# Altium PCB Optosense.PcbDoc
Units mm, origin at the board's own origin, x right, y up, seen from the top; angles counter-clockwise.
Board outline 54.67 x 13 mm, 2 copper layers (Top Layer, Bottom Layer), stack 0.571 mm thick; 46 components, 28 nets, 114 pads, 20 vias.
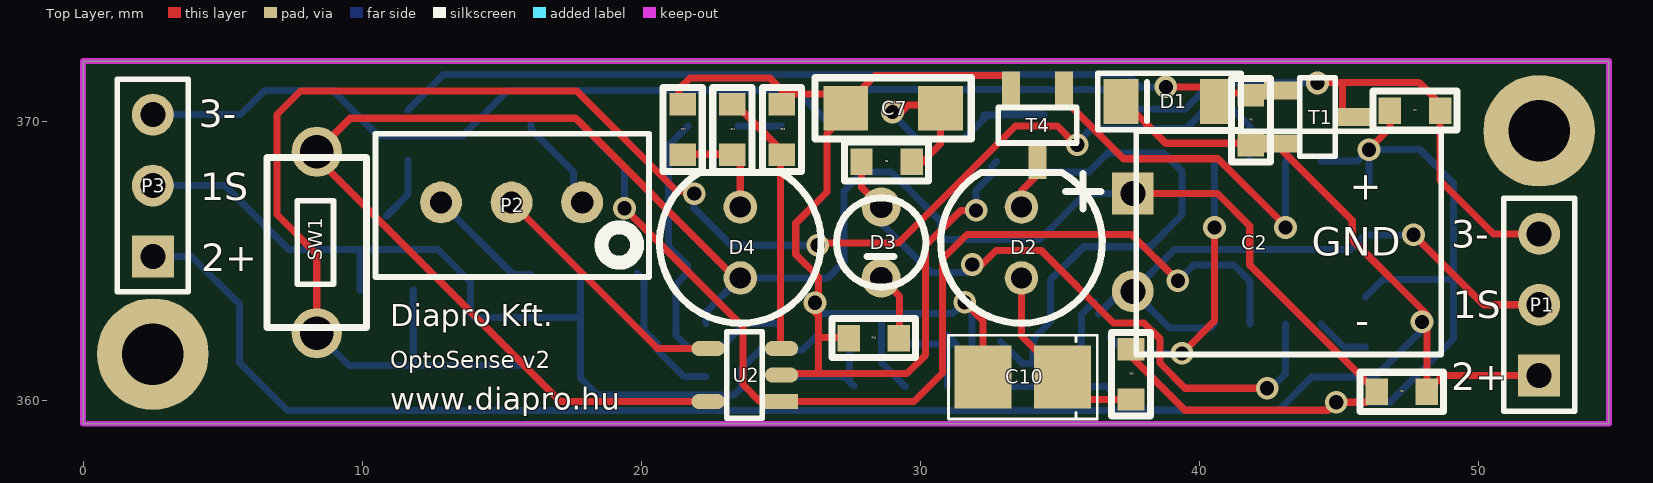
[diagram p0: Top Layer view]
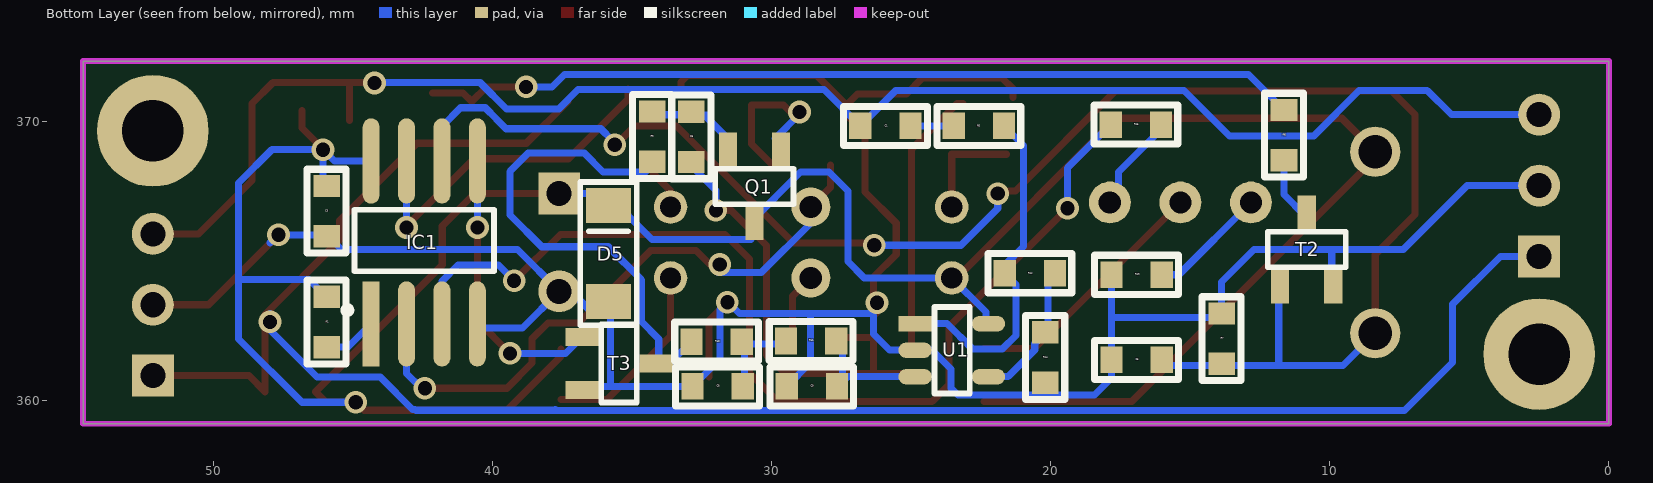
[diagram p1: Bottom Layer view, seen from below]
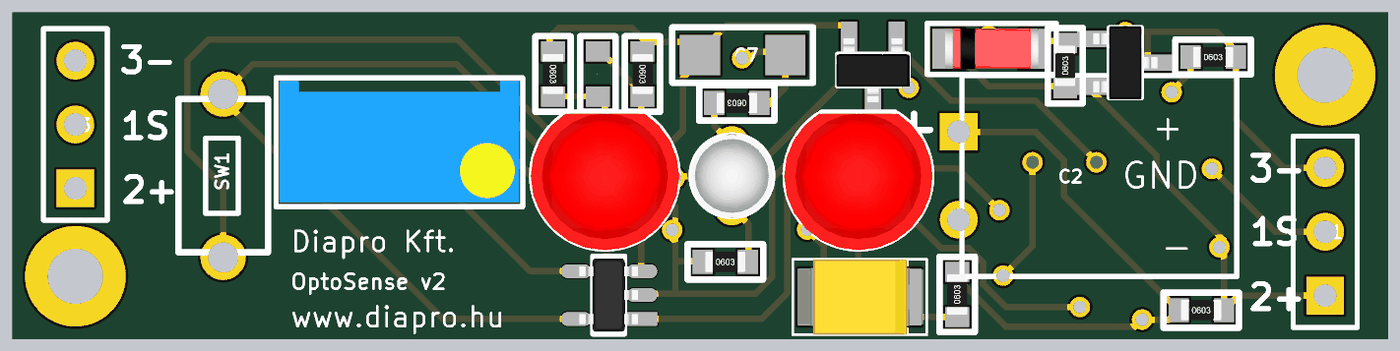
[diagram p2: 3D render of the assembled board from above, using the file's embedded part models]
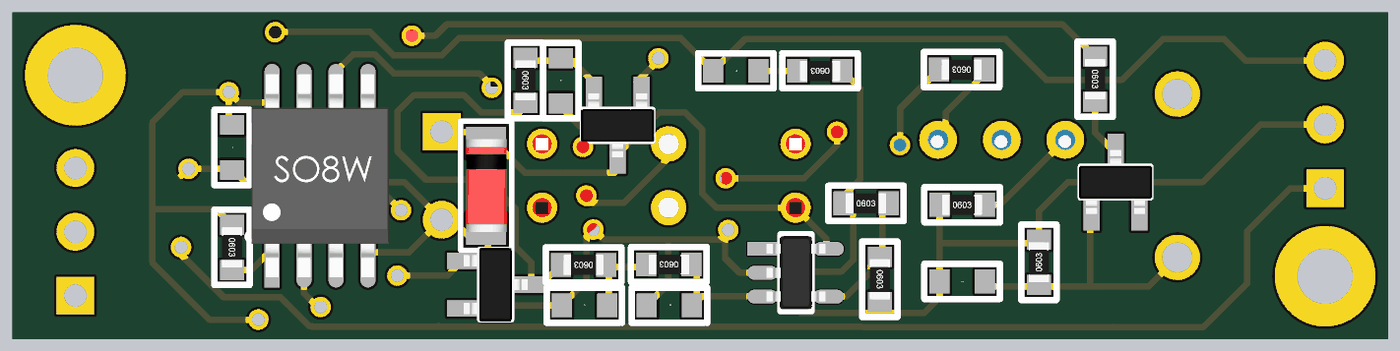
[diagram p3: 3D render of the assembled board from below, using the file's embedded part models]

## Layer stack, top to bottom
Top Layer: signal copper 0.0356
Dielectric: core 0.5, FR-4, Dk 4.8
Bottom Layer: signal copper 0.0356

## Board outline
0,359.148 0,372.148 54.674,372.148 54.674,359.148

## Design rules (kind name [scope] priority, off if disabled: settings)
Clearance [All] p1: gap=0.254
PolygonConnect [All] p1: connectstyle=Relief reliefconductorwidth=0.254 reliefentries=4 polygonreliefangle="90 Angle"
RoutingVias [All] p1: holewidth=0.711 width=1.27 viastyle="Through Hole" minholewidth=0.508 minwidth=0.813 maxholewidth=0.508 maxwidth=0.813
SilkToSilkClearance [All] p1: silktosilkclearance=0
SilkscreenOverComponentPads [All] p1: minsilkscreentomaskgap=0
SolderMaskExpansion [All] p1: expansion=0.102
Width [All] p1: maxlimit=0.254 minlimit=0.254 preferedwidth=0.254
26 further rules are at their usual default settings.

## Components (designator, comment, footprint, x,y, rotation, side; value= is the part's Value field where it differs from the comment)
C1 "150pF" FP_0603_CAP_080 25.924,369.823 r0 bottom
C2 "1000uF" CAP_8x11_fekvo 37.614,365.648 r0 top
C3 "100nF" FP_0603_CAP_080 45.949,366.772 r90 bottom
C5 "100nF" FP_0603_CAP_080 16.926,361.442 r180 bottom
C6 "100nF" FP_0603_CAP_080 32.879,369.433 r90 bottom
C7 "22uF" FP_1206_CAP_125 29.024,370.452 r0 top
C8 "150pF" FP_0603_CAP_080 31.94,360.492 r180 bottom
C9 "150pF" FP_0603_CAP_080 28.561,360.492 r180 bottom
C10 "100uF" FP_3528 33.674,360.823 r180 top
C11 "150pF" FP_0603_CAP_080 23.263,369.697 r90 top
D1 "ZENER_8.2V" SOD-80 38.922,370.698 r90 top
D2 "IR ado" LED_IR_5mm 33.624,365.648 r90 top
D3 "LED_RED" "led_3mm_standing R" 28.597,365.648 r90 top
D4 "IR vevo" LED_IR_5mm 23.549,365.648 r90 top
D5 "ZENER_3.3V" SOD-80 35.849,365.252 r180 bottom
IC1 "ATtiny13" WSON_n_SOIC8 42.449,365.648 r90 bottom
P1 "Header 3" HDR1X3 52.174,360.877 r90 top
P2 "POTI" RES_trimmer_helipot_mini_90 15.353,367.081 r270 top
P3 "Header 3" HDR1X3 2.5,365.148 r90 top
Q1 "NPN BC847A" TR_SOT23 30.619,367.655 r90 bottom
R1 "10K" FP_0603_RES 45.949,362.798 r270 bottom
R2 "1K5" FP_0603_RES 47.249,360.298 r0 top
R3 "100K" FP_0603_RES 41.843,370.027 r90 top
R4 "1K5" FP_0603_RES 47.724,370.373 r0 top
R5 "10K" FP_0603_RES 22.574,369.823 r0 bottom
R6 "10K" FP_0603_RES 11.643,369.494 r270 bottom
R7 "10K" FP_0603_RES 13.878,362.204 r90 bottom
R8 "15K" FP_0603_RES 28.79,368.544 r180 top
R9 "10K" FP_0603_RES 34.287,369.443 r270 bottom
R10 "100K" FP_0603_RES 31.974,362.098 r0 bottom
R11 "100K" FP_0603_RES 28.587,362.117 r0 bottom
R12 "3K" FP_0603_RES 20.749,364.548 r180 bottom
R13 "120R" FP_0603_RES 37.549,360.923 r90 top
R14 "2.2K" FP_0603_RES 20.199,361.527 r270 bottom
R15 "100K" FP_0603_RES 16.949,369.873 r0 bottom
R16 "10K" FP_0603_RES 28.333,362.219 r0 top
R17 "470K" FP_0603_RES 21.485,369.697 r270 top
R18 "560K" FP_0603_RES 25.041,369.697 r270 top
R19 "0R" FP_0603_RES 16.926,364.49 r180 bottom
SW1 "SW_tactile_2pin" SW_TACT_2PIN 8.374,365.648 r90 top
T1 "BSS84" FET_SOT23 44.233,370.144 r180 top
T2 "MMBF170" FET_SOT23 10.83,365.396 r270 bottom
T3 "MMBF170" FET_SOT23 35.468,361.315 r0 bottom
T4 "SI2306" FET_SOT23 34.199,369.848 r90 top
U1 "MCP6001" ANALOG_SOT23-5 23.532,361.787 r180 bottom
U2 "MCP6001" ANALOG_SOT23-5 23.699,360.898 r180 top

## Footprints (in the part's own frame and the unit in brackets; to place one, negate y for a bottom-side part, rotate by r counter-clockwise, add the part's x,y. Pads: shape width x height; smd on the part's side, far side on the other; paste and mask are expansions set on the pad)
ANALOG_SOT23-5 [mm] "SOT23, 5-Leads, Body 2.9x1.6mm, Pitch 0.95mm, Lead Span 2.8mm, IPC Medium Density"
  rect 1.2x0.55 smd mask+0.05: 1(-1.327,0.95)
  oval 1.2x0.55 smd mask+0.05: 2(-1.327,0) 3(-1.327,-0.95) 4(1.3,-0.95) 5(1.3,0.95)
  silkscreen extent -0.64,-1.55 0.64,1.55, body extent -1.17,-1.46 1.17,1.46, height 1
CAP_8x11_fekvo [mm]
  round 1.5 hole 0.9: N(0,-1.75)
  rect 1.5x1.5 hole 0.9: P(0,1.75)
  silkscreen extent -2.41,-4.01 11.05,3.99, body extent -0.35,-4.01 11.09,3.96, height 7.99
FET_SOT23 [mm] "SOT23-3 tok"
  rect 1.2x0.65 smd: D(-1.327,0) G(1.327,-0.95) S(1.327,0.95)
  silkscreen extent -0.64,-1.4 0.64,1.4, body extent -1.27,-1.46 1.27,1.46, height 0.97
FP_0603_CAP_080 [mm] "0.8mm magas 0603 kapacitás"
  rect 0.8x0.95 smd: 1(-0.9,0) 2(0.9,0)
  silkscreen extent -1.5,-0.7 1.5,0.7, body extent -0.8,-0.4 0.76,0.4, height 0.8
FP_0603_RES [mm] "0603 ellenállás"
  rect 0.8x0.95 smd: 1(-0.9,0) 2(0.9,0)
  silkscreen extent -1.5,-0.7 1.5,0.7, body extent -0.8,-0.4 0.8,0.4, height 0.44
FP_1206_CAP_125 [mm] "1206 kapacitás 1.25 mm"
  rect 1.6x1.6 smd: 1(-1.7,0) 2(1.7,0)
  silkscreen extent -2.8,-1.1 2.8,1.1, body extent -1.52,-0.79 1.58,0.79, height 1.25
FP_3528 [mm] "3528 TANTÁL SMD \"B\"-TOK"
  rect 2.05x2.25 smd: N(1.425,0) P(-1.425,0)
  silkscreen extent -2.67,-1.5 2.67,1.5, body extent -2.52,-1.5 2.48,1.5, height 2.11
HDR1X3 [mm] "Connector; Header; 3 Position"
  rect 1.5x1.5 hole 0.9: 1(0,0)
  round 1.5 hole 0.9: 2(2.54,0) 3(5.08,0)
  silkscreen extent -1.27,-1.27 6.35,1.27
"led_3mm_standing R" [mm]
  round 1.4 hole 0.8: A(1.27,0) K(-1.27,0)
  silkscreen extent -1.6,-1.6 1.6,1.6, body extent -1.66,-1.65 1.64,1.64, height 5.51
LED_IR_5mm [mm]
  round 1.2 hole 0.762: A(-1.27,0) K(1.27,0)
  silkscreen extent -2.9,-2.89 2.51,2.89, body extent -3.02,-3.02 2.67,3.02, height 9.53
RES_trimmer_helipot_mini_90 [mm]
  round 1.5 hole 0.8: 1(0,2.527) 2(0,0) 3(0,-2.527)
  silkscreen extent -2.46,-4.88 2.67,4.93, body extent -2.33,-4.74 2.5,4.79, height 11.55
SOD-80 [mm]
  rect 1.6x1.25 smd: A(0,-1.725) K(0,1.725)
  silkscreen extent -1.02,-2.57 1.02,2.57, body extent -0.79,-1.85 0.81,1.85, height 1.61
SW_TACT_2PIN [mm]
  round 1.8 hole 1.2: 1(-3.25,0) 2(3.25,0)
  silkscreen extent -3.05,-1.78 3.05,1.78, body extent -3.75,-1.78 3.75,1.78, height 4.3
TR_SOT23 [mm] "SOT23-3 tok"
  rect 1.2x0.65 smd: B(1.327,-0.95) C(-1.327,0) E(1.327,0.95)
  silkscreen extent -0.64,-1.4 0.64,1.4, body extent -1.27,-1.46 1.27,1.46, height 0.97
WSON_n_SOIC8 [mil]
  rect 120x23.62 smd: 1(-115,75)
  oval 120x23.62 smd: 2(-115,25) 3(-115,-25) 4(-115,-75) 5(115,-75) 6(115,-25) 7(115,25)
  oval 120.42x23.62 smd: 8(115,75)
  silkscreen extent -100,-98 46,113, body extent -159,-107 159,107, height 86

## Part data
C1 C3 C5 C6 C8 C9 C11: library part CAP, "Capacitor"
C2 C10: library part CAP_ELECT, "Polarized Capacitor"
C7: library part Cap, "Capacitor"
D1 D5: library part ZENER, "Zener Diode"
D2 D4: library part LED_B, "Typical LED"
D3: library part LED_R, "Typical LED"
P1 P3: "Header, 3-Pin"
Q1: library part NPN
R1 R2 R3 R4 R5 R6 R7 R8 R9 R10 R11 R12 R13 R14 R15 R16 R17 R18 R19: library part RES, "Resistor"
T1: library part PMOS
T2 T3 T4: library part NMOS

## Free pads (board coordinates)
  round 4 hole 2.2: 0(2.5,361.648) 0(52.174,369.648)

## Via types
v1: diameter 0.813, hole 0.508, Top Layer to Bottom Layer, 20 vias

## Nets (pads, with @x,y where several pads share a name; then routed paths per layer and width w, separated by ;. In a path a pad name is that pad's centre, name@x,y a point inside that pad or via, vN(x,y) a via of type N, cw(c..) or ccw(c..) an arc to the next point about the centre after c; other vN are vias at no path point)
2V4: C2.P C3.2 D4.A D5.K IC1.8 Q1.C R1.1 R2.1 R4.1 R13.2 SW1.2 U1.5 U2.5 | length 102.4
  Top Layer w0.254: U2.5 17.099,359.948 8.374,368.673 SW1.2 9.574,370.098 17.651,370.098 23.371,364.378 D4.A ; R13.2 37.549,361.573 39.486,359.636 44.613,359.636 v1(44.901,359.923) 45.974,359.923 R2.1 41.805,364.842 41.805,366.237 40.644,367.398 C2.P ; v1(46.074,368.973) 46.074,368.998 46.824,369.748 R4.1
  Bottom Layer w0.254: U1.5@22.324,362.748 22.324,363.153 D4.A 26.682,364.378 27.266,364.962 27.266,367.49 27.949,368.173 28.963,368.173 30.747,366.389 30.747,365.76 34.286,365.76 35.924,367.398 C2.P ; IC1.8 45.67,368.569 v1(46.074,368.973) ; v1(44.901,359.923) 44.899,359.921 46.835,359.921 49.105,362.191 49.105,364.323 ; R1.1 46.574,364.323 49.105,364.323 ; C3.2@46.074,367.723 v1(46.074,368.973) ; v1(46.074,368.973) 47.911,368.973 49.105,367.779 49.105,364.323
19KHZ: IC1.5 T3.G | length 10.4
  Top Layer w0.254: v1(39.375,361.673) 40.544,362.842 v1(40.544,366.181) v1@40.544,366.385
  Bottom Layer w0.254: T3.G 37.387,361.673 v1(39.375,361.673) ; v1@40.544,366.218 IC1.5
GND: C2.N C3.1 C5.1 C6.1 C7.1 C8.1 C9.1 C10.N D5.A IC1.4 P1.2 P3.2 R7.2 R14.2 R16.1 R17.1 R18.1 R19.1 T2.S T3.S T4.S U1.2 U2.2 | length 117.5
  Top Layer w0.254: R17.1@21.358,370.84 21.358,371.157 21.742,371.541 24.606,371.541 25.174,370.973 26.924,370.973 27.324,370.573 28.384,371.633 33.016,371.633 33.249,371.4 T4.S T4.S@33.249,371.15 ; U2.2 25.076,360.948 26.349,360.948 ; v1(26.225,363.489) 26.225,363.147 26.349,363.023 ; C7.1@27.324,370.223 26.656,369.555 26.656,367.455 25.537,366.335 25.537,365.222 26.349,364.409 26.349,363.023 ; R16.1@27.674,362.244 26.377,362.244 26.349,362.272 ; v1(31.586,363.506) 32.249,362.844 C10.N ; v1(31.999,366.798) 31.449,366.798 30.187,365.536 30.187,361.609 29.526,360.948 26.349,360.948 ; v1(47.674,365.923) 50.18,363.417 P1.2 ; 26.349,360.948 26.349,362.272 ; 26.349,362.272 26.349,363.023
  Bottom Layer w0.254: P3.2 5.075,367.688 7.367,365.396 9.865,365.396 ; T2.S@9.931,363.95 9.931,365.33 9.865,365.396 ; R19.1 17.826,362.966 ; C9.1 28.61,361.343 28.61,363.106 ; v1(31.999,366.798) 31.999,367.511 C6.1@32.676,368.188 ; C6.1@32.549,368.188 32.549,368.375 C6.1@32.722,368.548 ; D5.A@36.23,363.527 35.773,363.07 35.773,360.517 35.747,360.492 ; D5.A@36.393,363.091 37.2,363.898 C2.N ; T3.S 36.668,360.492 35.747,360.492 ; IC1.4 40.405,362.588 38.924,362.588 C2.N ; 47.974,365.638 47.689,365.923 v1(47.674,365.923) 45.949,365.923 45.42,365.394 39.11,365.394 C2.N ; 9.865,365.396 12.718,365.396 13.878,364.236 R7.2 14.016,362.966 17.826,362.966 ; 17.826,362.966 C5.1 17.826,360.796 18.435,360.187 19.466,360.187 19.472,360.181 23.329,360.181 23.574,360.426 23.574,361.118 24.254,361.798 25.778,361.798 26.349,362.369 26.349,363.023 26.432,363.106 28.61,363.106 ; 28.61,363.106 31.157,363.106 31.557,363.506 v1(31.586,363.506) 31.855,363.238 31.855,361.476 C8.1 35.747,360.492
IR: IC1.7 T4.G | length 12.8
  Top Layer w0.254: T4.G@35.149,371.15 35.149,370.778 37.279,368.648 40.668,368.648 v1@43.084,366.232
  Bottom Layer w0.254: v1@43.084,365.963 IC1.7
  other v1: 43.084,366.181
LED: D3.A IC1.2 R8.2 | length 23.1
  Top Layer w0.254: R8.2@27.899,368.423 27.899,367.616 D3.A ; v1(31.863,364.861) 31.863,364.634 31.924,364.573 32.71,365.359 34.332,365.359 36.924,362.767 38.019,362.767 38.588,362.198 38.588,361.324 39.489,360.423 v1(42.426,360.423)
  Bottom Layer w0.254: D3.A 28.597,366.35 30.374,364.573 31.924,364.573 31.863,364.634 v1(31.863,364.861) ; v1(42.426,360.423) 42.549,360.423 43.084,360.958 IC1.2
LINE_A: D1.K P1.1 P3.1 R2.2 R3.1 T1.S | length 72.7
  Top Layer w0.254: D1.K@37.299,370.698 38.793,369.204 42.709,369.204 45.478,366.435 45.478,365.744 48.149,363.073 R2.2 48.728,360.877 P1.1 ; P1.1@51.824,360.298 P1.1@52.174,360.648
  Bottom Layer w0.254: P3.1 3.889,365.148 5.601,363.436 5.601,361.353 7.324,359.631 20.87,359.631 20.871,359.632 37.722,359.632 37.754,359.664 37.782,359.636 42.752,359.636 42.78,359.664 42.867,359.664 44.025,360.822 46.287,360.822 47.974,362.509 v1(47.974,362.804) v1@47.974,363.098
LINE_B: C1.2 P1.3 P3.3 R4.2 T1.D | length 58.6
  Top Layer w0.254: v1@44.117,371.374 v1@44.244,371.374 ; v1(44.233,371.363) v1@44.244,371.374 ; T1.D@45.128,370.017 45.128,371.306 45.061,371.374 ; P1.3 50.534,365.957 48.624,367.866 R4.2 48.624,370.625 47.875,371.374 45.061,371.374 ; v1@44.244,371.374 45.061,371.374
  Bottom Layer w0.254: P3.3 5.646,370.228 6.512,371.094 8.95,371.094 10.576,369.468 13.599,369.468 15.224,371.094 25.553,371.094 C1.2 28.13,371.129 36.937,371.129 37.63,370.436 39.505,370.436 40.443,371.374 44.276,371.374 v1@44.276,371.421
MUTE: C5.2 IC1.6 R7.1 SW1.1 T2.G | length 62.1
  Top Layer w0.254: SW1.1 8.374,365.223 6.949,366.648 6.949,370.23 7.792,371.073 17.687,371.073 21.262,367.498 21.899,367.498 v1(21.899,367.398) ; v1(26.324,365.548) 26.409,365.633 29.219,365.633 33.41,369.824 34.91,369.824 35.48,369.254 35.668,369.254 35.834,369.089 35.834,369.082 v1@35.8,369.048
  Bottom Layer w0.254: SW1.1@7.899,361.923 SW1.1 9.533,361.239 11.592,361.239 15.823,361.239 C5.2 ; 11.831,361.239 T2.G@11.831,363.95 ; v1(21.899,367.398) 21.899,366.87 23.221,365.548 v1(26.324,365.548) ; v1@35.716,369.315 36.124,369.723 39.524,369.723 39.863,370.062 39.863,370.075 40.262,370.474 41.148,370.474 41.814,369.808 IC1.6
  other v1: 35.622,369.15
NetC1_1: C1.1 R5.2 | length 1.5
  Bottom Layer w0.254: R5.2 C1.1
NetC6_2: C6.2 Q1.E R9.1 | length 3.2
  Bottom Layer w0.254: Q1.E@31.645,369.443 C6.2@32.407,370.205 ; 32.28,370.205 32.827,370.205 32.845,370.223 R9.1@34.422,370.223
NetC7_2: C7.2 Q1.B R8.1 | length 6.1
  Top Layer w0.254: v1@28.9,370.248 28.999,370.248 29.124,370.123 29.574,370.573 30.724,370.573 30.724,369.173 29.974,368.423 R8.1@29.699,368.423
  Bottom Layer w0.254: v1@28.9,370.248 28.999,370.248 Q1.B@29.872,369.375
  other v1: 29.002,370.324
NetC8_2: C8.2 R10.1 R11.2 | length 4.1
  Bottom Layer w0.254: R11.2 29.588,362.016 31.281,362.016 30.974,362.323 C8.2@30.974,360.498
NetC9_2: C9.2 R11.1 U1.3 | length 4.6
  Bottom Layer w0.254: U1.3@24.951,360.848 27.274,360.848 27.624,360.498 27.469,360.653 27.469,361.9 R11.1
NetC10_P: C10.P D2.A R13.1 | length 6.9
  Top Layer w0.254: D2.A 33.624,362.298 C10.P 35.899,360.023 R13.1
NetC11_1: C11.1 D4.K R17.2 | length 3.8
  Top Layer w0.254: R17.2@21.589,368.808 23.549,368.808 D4.K
NetC11_2: C11.2 R18.2 U2.3 | length 9.7
  Top Layer w0.254: C11.2@23.149,370.623 23.353,370.623 24.989,368.987 24.989,361.885 U2.3
NetD1_A: D1.A R3.2 R6.1 T1.G | length 31.6
  Top Layer w0.254: v1(38.799,371.223) 40.224,371.223 40.749,370.698 41.058,371.007 R3.2@42.15,371.007
  Bottom Layer w0.254: R6.1 12.914,371.665 37.424,371.665 37.866,371.223 v1(38.799,371.223)
NetD2_K: D2.K T4.D | length 1.6
  Top Layer w0.254: D2.K 33.624,367.502 34.249,368.127 T4.D@34.249,368.273
NetD3_K: D3.K R16.2 | length 2.2
  Top Layer w0.254: D3.K 29.247,363.728 R16.2@29.247,362.422
NetIC1_1: IC1.1 R1.2 | length 1.9
  Bottom Layer w0.254: IC1.1 45.183,361.898 R1.2
NetP2_1: P2.1 R15.1 | length 3.6
  Bottom Layer w0.254: R15.1 16.049,369.7 17.574,368.175 17.574,367.387 P2.1
NetP2_2: P2.2 U2.4 | length 9.2
  Top Layer w0.254: P2.2 20.586,361.848 U2.4
NetP2_3: P2.3 R19.2 | length 4.3
  Bottom Layer w0.254: P2.3 15.417,364.49 R19.2
NetR6_2: R6.2 T2.D | length 2.3
  Bottom Layer w0.254: T2.D@10.881,366.604 11.643,367.366 R6.2
NetR9_2: R9.2 R10.2 T3.D | length 17.7
  Bottom Layer w0.254: R10.2 33.657,361.315 T3.D 34.046,361.41 34.046,362.191 34.668,362.814 34.668,364.31 35.854,365.496 38.239,365.496 39.374,366.631 39.374,368.198 38.724,368.848 36.714,368.848 36.039,368.173 R9.2@34.649,368.173 ; R9.2@34.272,368.423 R9.2@34.522,368.173
NetR12_2: R12.2 R14.1 U1.4 | length 5.2
  Bottom Layer w0.254: R12.2 20.103,364.294 20.103,362.498 20.574,362.028 20.574,361.799 21.525,360.848 U1.4@22.324,360.848
SENSE: IC1.3 R15.2 U2.1 | length 38
  Top Layer w0.254: v1(19.399,366.873) 23.644,362.628 23.644,360.553 24.249,359.948 U2.1 29.774,359.948 30.799,360.973 30.799,365.059 31.677,365.937 37.569,365.937 v1(39.229,364.276) v1@39.229,364.124
  Bottom Layer w0.254: R15.2 19.399,368.323 v1(19.399,366.873) ; v1@39.229,364.124 v1(39.229,364.276) 39.788,364.835 41.237,364.835 41.814,364.258 IC1.3
SINE: R5.1 R12.1 U1.1 | length 12.5
  Bottom Layer w0.254: R5.1 20.977,369.126 20.977,365.506 21.649,364.834 R12.1 21.246,364.145 21.246,362.316 21.724,361.838 22.814,361.838 23.724,362.748 U1.1@24.951,362.748

## Keep-outs
Keep-Out Layer:
  lines w0.203: 0,359.148 0,372.148 4.974,372.148 49.674,372.148 54.674,372.148 54.674,359.148 49.674,359.148 4.974,359.148 0,359.148

## Silkscreen, mask and mechanical layers (free items; w line width, h text height)
Top Overlay:
  text "3-" at 4.151,369.771 h1
  text "+" at 45.529,368.198 h1.02 r270
  text "1S" at 4.202,367.155 h1
  text "3-" at 49.033,365.453 h1
  text "GND" at 44.03,365.176 h1.02
  text "2+" at 4.227,364.615 h1
  text "1S" at 49.084,362.938 h1
  text "Diapro Kft." at 11,362.648 h0.8
  text "-" at 45.579,362.356 h1.02
  text "OptoSense v2" at 11,361.148 h0.6
  text "2+" at 49.033,360.347 h1
  text "www.diapro.hu" at 11,359.648 h0.8